# Altium PCB NFCard.PcbDoc
Units mil, origin at the board's own origin, x right, y up, seen from the top; angles counter-clockwise.
Board outline 2125.98 x 3366.14 mil, 2 copper layers (Top Layer, Bottom Layer), stack 34.296 mil thick; 35 components, 38 nets, 141 pads, 80 vias.
Unrouted connection lines stored in the file: 3.
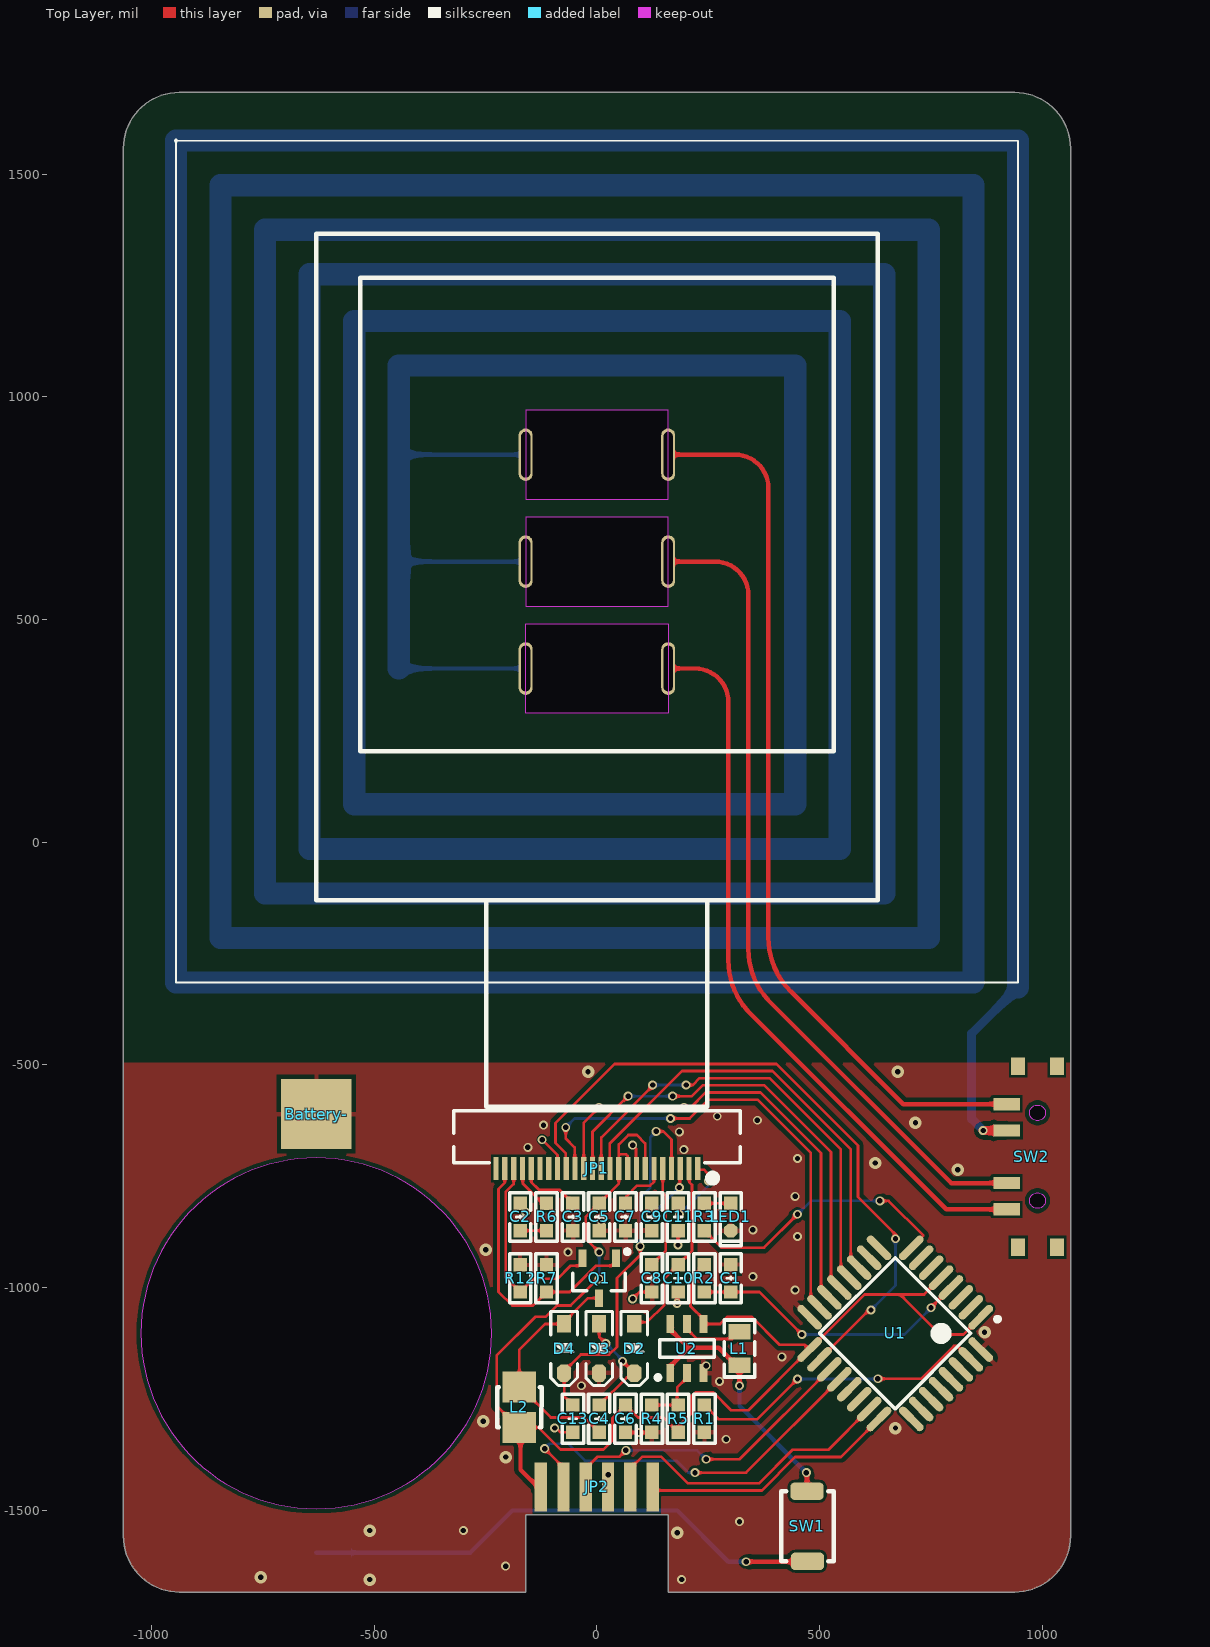
[diagram p0: Top Layer view]
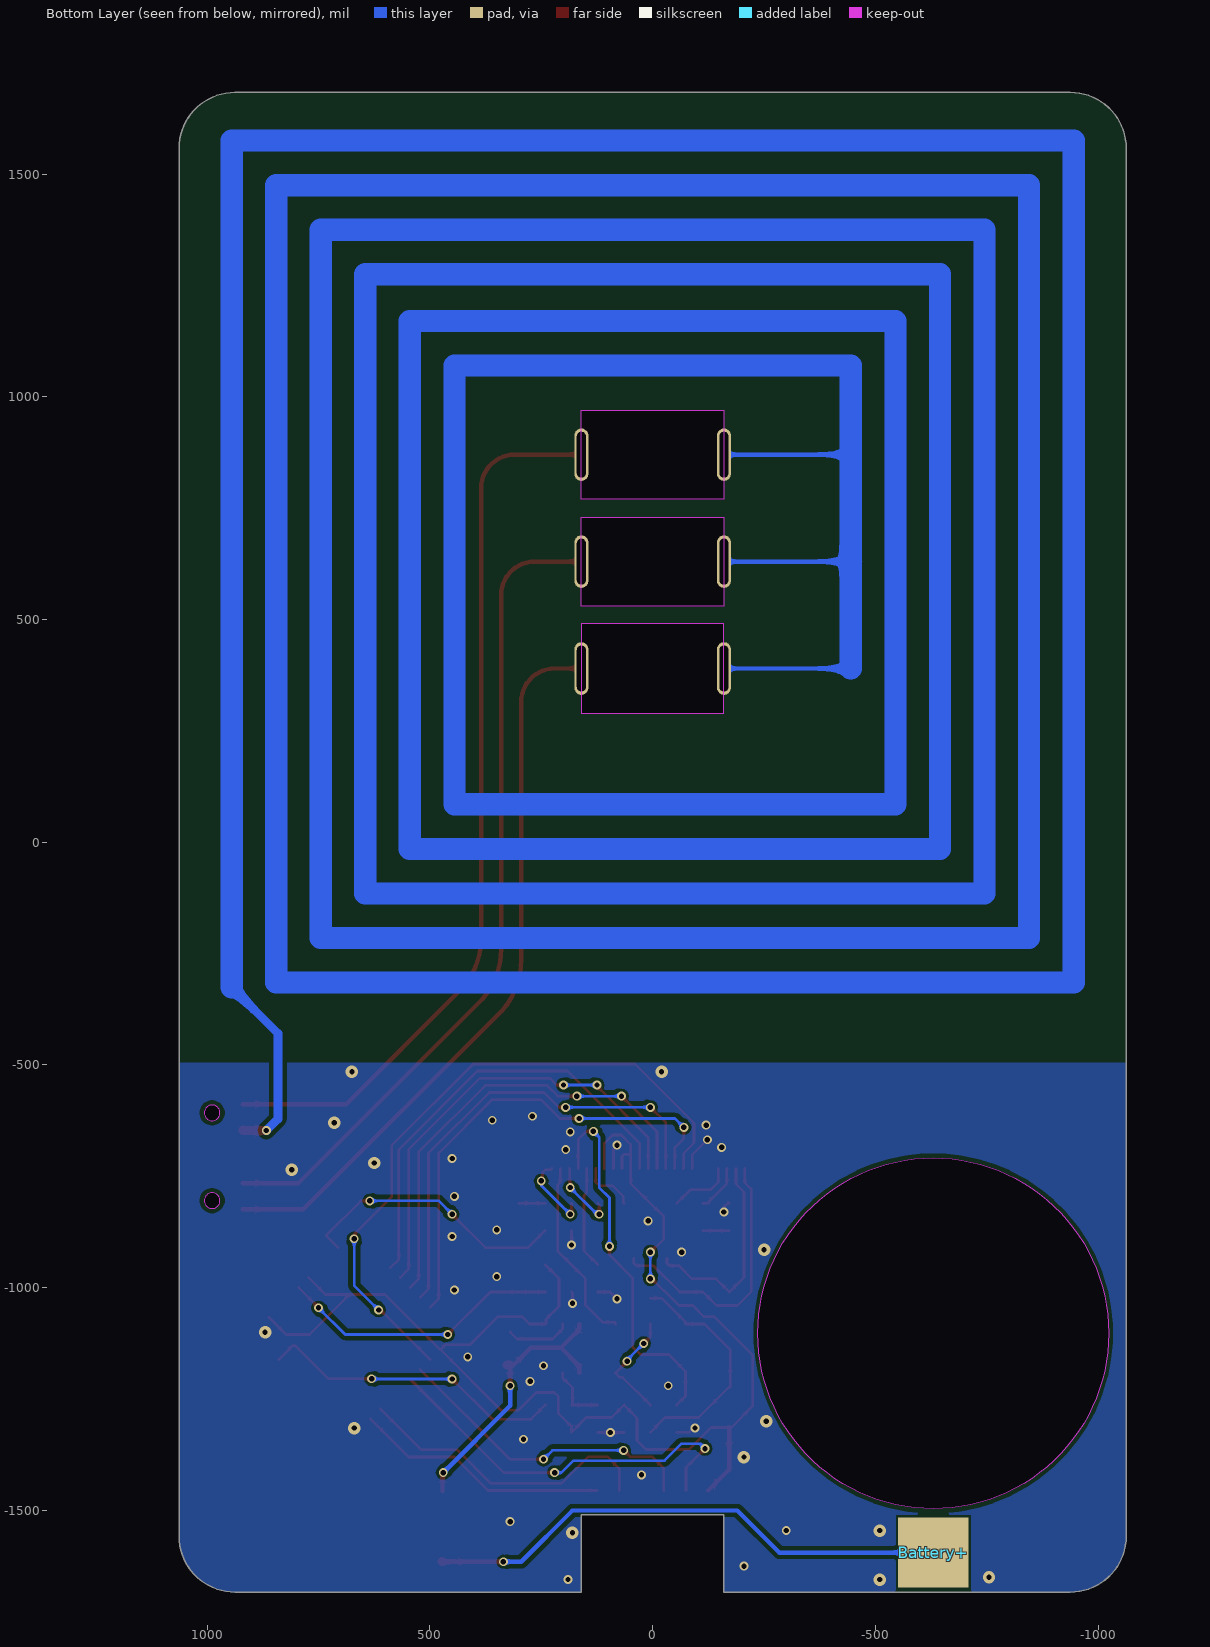
[diagram p1: Bottom Layer view, seen from below]
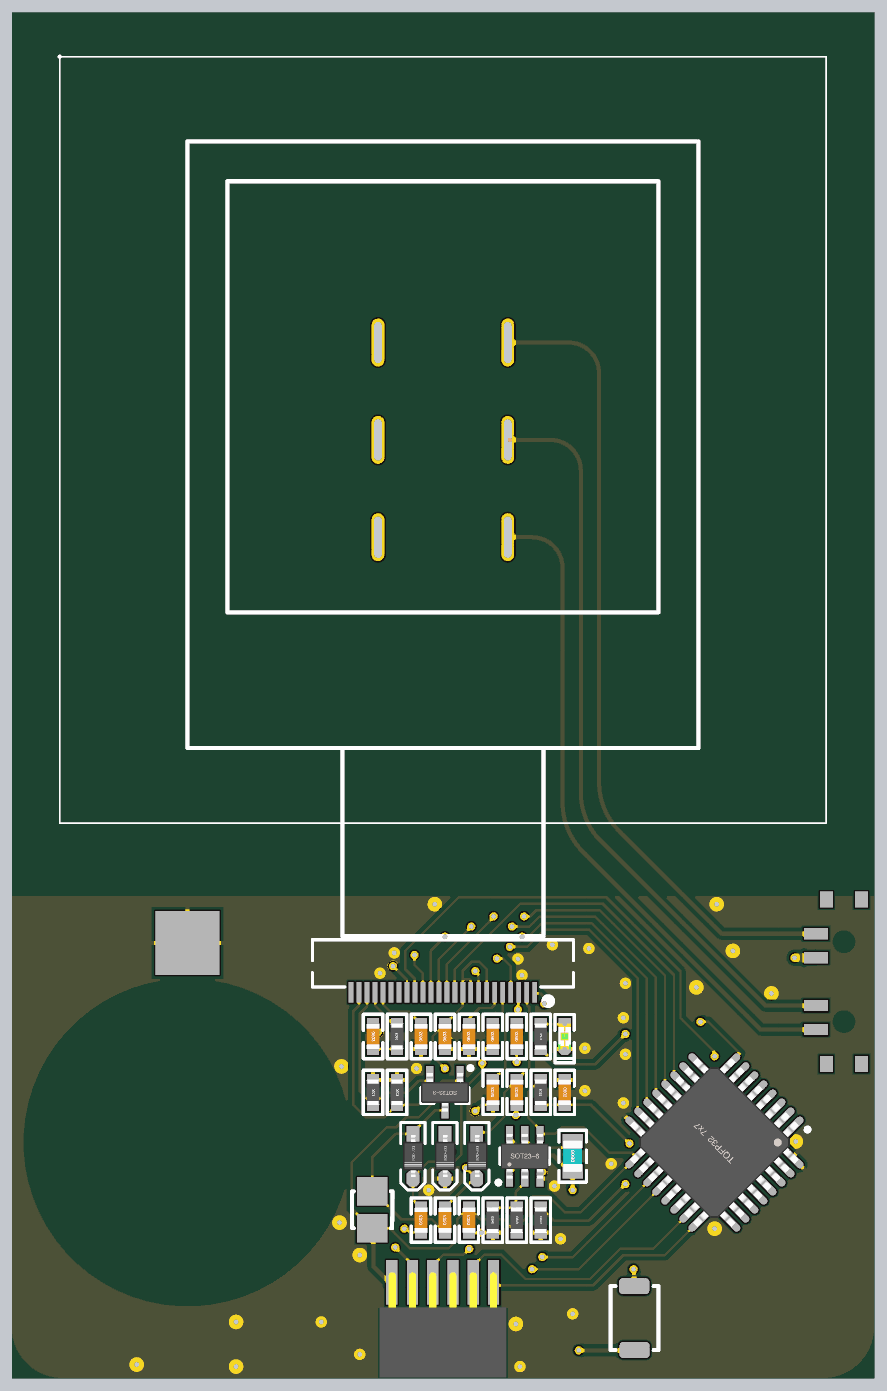
[diagram p2: 3D render of the assembled board from above, using the file's embedded part models]

## Layer stack, top to bottom
Top Solder: solder mask 0.4, Solder Resist, Dk 3.5
Top Layer: signal copper 1.4
Dielectric 1: dielectric 31.4961, FR-4, Dk 4.8
Bottom Layer: signal copper 1.4
Bottom Solder: solder mask 0.4, Solder Resist, Dk 3.5

## Board outline
-1062.99,-1557.87 ccw(c-937.8,-1557.87) -937.8,-1683.07 -160,-1683.07 -160,-1510 160,-1510 160,-1683.07 937.8,-1683.07 ccw(c937.8,-1557.87) 1062.99,-1557.87 1062.99,1557.87 ccw(c937.8,1557.87) 937.8,1683.07 -937.8,1683.07 ccw(c-937.8,1557.87) -1062.99,1557.87
cut-out: -1023.62,-1102.36 ccw(c-629.92,-1102.36) -629.92,-1496.06 ccw(c-629.92,-1102.36) -236.22,-1102.36 ccw(c-629.92,-1102.36) -629.92,-708.66 ccw(c-629.92,-1102.36)
cut-out: -160,770 160,770 160,970 -160,970
cut-out: -160,529.92 160,529.92 160,729.92 -160,729.92
cut-out: -160,290 -160,490 160,490 160,290

## Design rules (kind name [scope] priority, off if disabled: settings)
Clearance [All] p1: gap=10 ignorepadtopadclearanceinfootprint=FALSE except(0: Arc-Hole Track-Hole SMDPad-Hole THPad-Hole Via-Hole Fill-Hole Poly-Hole Region-Hole Text-Hole; 6: Arc-THPad Track-THPad SMDPad-SMDPad SMDPad-THPad SMDPad-Via SMDPad-Fill SMDPad-Poly SMDPad-Region SMDPad-Text THPad-THPad THPad-Via THPad-Fill THPad-Poly THPad-Region THPad-Text Via-Via Via-Fill Via-Poly Via-Region Via-Text)
PlaneConnect [All] p1: pad.planeconnectstyle=Relief pad.reliefexpansion=20 pad.reliefentries=4 pad.reliefconductorwidth=10 pad.reliefairgap=10 via.planeconnectstyle=Direct via.reliefexpansion=20 via.reliefentries=4 via.reliefconductorwidth=10 via.reliefairgap=10
PolygonConnect [All] p1: thpad.connectstyle=Relief thpad.reliefconductorwidth=10 thpad.reliefentries=4 thpad.polygonreliefangle="90 Angle" thpad.airgapwidth=10 smdpad.connectstyle=Relief smdpad.reliefconductorwidth=10 smdpad.reliefentries=4 smdpad.polygonreliefangle="90 Angle" smdpad.airgapwidth=10 via.connectstyle=Direct via.reliefconductorwidth=10 via.reliefentries=4 via.polygonreliefangle="90 Angle" via.airgapwidth=10
RoutingVias [All] p1: holewidth=12 width=20 viastyle="Through Hole" minholewidth=12 minwidth=20 maxholewidth=28 maxwidth=50
SolderMaskExpansion [All] p1: expansion=4
Width [All] p1: maxlimit=100 minlimit=6 preferedwidth=10
29 further rules are at their usual default settings.

## Components (designator, comment, footprint, x,y, rotation, side; value= is the part's Value field where it differs from the comment)
Battery+ "BAT_PAD" BAT_PAD#1 -629.92,-1594.49 r90 top
Battery- "BAT_PAD" BAT_PAD#2 -640,-615 r90 top
C1 "0.1uF" "C 0603_L" 300.28,-978.94 r270 top
C2 "1uF" "C 0603_L" -172.17,-841.14 r270 top
C3 "1uF" "C 0603_L" -54.06,-841.14 r90 top
C4 "0.1uF" "C 0603_L" 5,-1293.9 r90 top
C5 "0.1uF" "C 0603_L" 5,-841.14 r90 top
C6 "4.7uF" "C 0603_L" 64.06,-1293.9 r90 top
C7 "1uF" "C 0603_L" 64.06,-841.14 r90 top
C8 "1uF" "C 0603_L" 123.11,-978.94 r90 top
C9 "1uF" "C 0603_L" 123.11,-841.14 r90 top
C10 "1uF" "C 0603_L" 182.17,-978.94 r90 top
C11 "1uF" "C 0603_L" 182.17,-841.14 r90 top
C13 "1uF" "C 0603_L" -54.06,-1293.9 r90 top
D2 "1N5819" SOD-323 83.74,-1136.42 r270 top
D3 "1N5819" SOD-323 5,-1136.42 r270 top
D4 "1N5819" SOD-323 -73.74,-1136.42 r270 top
JP1 "FPC1.0-24P" "FPC0.5 CB-24P" 0,-633.98 r180 top
JP2 "HDR-1X6" HDR1.27-M-6P-S 0,-1455 r0 top
L1 "4.7uH" "L 0805_L" 319.96,-1136.42 r90 top
L2 "68uH" "FB 2520_L" -174.13,-1268.31 r90 top
LED1 "Blue" "LED 0603B" 300.28,-841.14 r270 top
Q1 "Si1308EDL" SOT23-3L 5,-978.94 r180 top
R1 "10K" "R 0603_L" 241.22,-1293.9 r270 top
R2 "10K" "R 0603_L" 241.22,-978.94 r90 top
R3 "3K" "R 0603_L" 241.22,-841.14 r270 top
R4 "NC" "R 0603_L" 123.11,-1293.9 r90 top
R5 "0R" "R 0603_L" 182.17,-1293.9 r270 top
R6 "1K" "R 0603_L" -113.11,-841.14 r90 top
R7 "10K" "R 0603_L" -113.11,-978.94 r270 top
R12 "3R" "R 0603_L" -172.17,-978.94 r270 top
SW1 "3x6x5" "TSW SMD-3*4*2" 472.44,-1535.43 r270 top
SW2 "MSKT-13C01" MSKT-13C01 988.9,-705.94 r180 top
U1 "STM32L051K8" "TQFP32 7x7_N" 669.29,-1102.36 r135 top
U2 "TPS61221DCKT" SOT23-6L 201.85,-1136.42 r0 top

## Footprints (in the part's own frame and the unit in brackets; to place one, negate y for a bottom-side part, rotate by r counter-clockwise, add the part's x,y. Pads: shape width x height; smd on the part's side, far side on the other; paste and mask are expansions set on the pad)
BAT_PAD#1 [mm]
  rect 4x4 smd far side: ""(0,0)
BAT_PAD#2 [mm]
  rect 4x4 smd: ""(0.121,-0.256)
"C 0603_L" [mil] "无极性贴片电容"
  rect 30x30 smd: 1(-30.59,0) 2(30.59,0)
  silkscreen extent -55,-24 55,24, body extent -31,-16 31,16, height 32
"FB 2520_L" [mil] "小功率贴片磁珠"
  rect 70x75 smd: 1(-45.28,0) 2(45.28,0)
  silkscreen extent -45,-50 45,50, body extent -50,-41 50,41, height 39
"FPC0.5 CB-24P" [mm] "长：16.2mm，宽：5.2mm，高：2mm"
  rect 0.3x1.3 smd: 1(-5.75,2.497) 2(-5.25,2.497) 3(-4.75,2.497) 4(-4.25,2.497) 5(-3.75,2.497) 6(-3.25,2.497) 7(-2.75,2.497) 8(-2.25,2.497) 9(-1.75,2.497) 10(-1.25,2.497) 11(-0.75,2.497) 12(-0.25,2.497) 13(0.25,2.497) 14(0.75,2.497) 15(1.25,2.497) 16(1.75,2.497) 17(2.25,2.497) 18(2.75,2.497) 19(3.25,2.497) 20(3.75,2.497) 21(4.25,2.497) 22(4.75,2.497) 23(5.25,2.497) 24(5.75,2.497)
  silkscreen extent -8.18,-0.8 8.18,3.23
HDR1.27-M-6P-S [mm] "直插，脚距：1.27mm"
  rect 0.7x2.8 smd: 1(-3.2,0.2) 2(-1.905,0.2) 3(-0.635,0.2) 4(0.635,0.2) 5(1.905,0.2) 6(3.175,0.2)
  body extent -3.97,-5.77 3.97,0.83, height 1.1
"L 0805_L" [mil] "小功率贴片电感"
  rect 35x50 smd: 1(-37.4,0) 2(37.4,0)
  silkscreen extent -64,-34 64,34, body extent -39,-24 39,24, height 35
"LED 0603B" [mil] "蓝色0603LED"
  rect 30x30 smd: 1(-30.59,0)
  oct 30x30 smd: 2(30.59,0)
  silkscreen extent -54,-24 65,24, body extent -31,-16 32,16, height 24
MSKT-13C01 [mm]
  rect 1.5x0.7 smd: 1(1.75,3) 2(1.75,1.5) 3(1.75,-1.5) 4(1.75,-3)
  rect 0.8x1 smd: ""(-1.1,5.15) ""(-1.1,-5.15) ""(1.1,5.15) ""(1.1,-5.15)
  Keep-Out Layer board cut-out: -0.45,-2.5 -0.416,-2.328 -0.318,-2.182 -0.172,-2.084 0,-2.05 0,-2.05 0.172,-2.084 0.318,-2.182 0.416,-2.328 0.45,-2.5 0.45,-2.5 0.416,-2.672 0.318,-2.818 0.172,-2.916 0,-2.95 0,-2.95 -0.172,-2.916 -0.318,-2.818 -0.416,-2.672 -0.45,-2.5
  Keep-Out Layer board cut-out: 0,2.05 -0.172,2.084 -0.318,2.182 -0.416,2.328 -0.45,2.5 -0.45,2.5 -0.416,2.672 -0.318,2.818 -0.172,2.916 0,2.95 0,2.95 0.172,2.916 0.318,2.818 0.416,2.672 0.45,2.5 0.45,2.5 0.416,2.328 0.318,2.182 0.172,2.084 0,2.05
"R 0603_L" [mil] "1/10W贴片电阻"
  rect 30x30 smd: 1(-30.59,0) 2(30.59,0)
  silkscreen extent -55,-24 55,24, body extent -31,-16 32,16, height 16
SOD-323 [mm] "1.8x1.3X0.9mm（长宽高，不包括引脚）"
  rect 1x0.8 smd: 1(-1.4,0)
  oct 1x0.8 smd: 2(1.4,0)
  silkscreen extent -2.11,-0.76 2.11,0.76, body extent -1.34,-0.63 1.31,0.67, height 1
SOT23-3L [mm] "3x1.3x1mm(长宽高)"
  rect 0.45x1 smd: 1(-0.95,-1.143) 2(0.95,-1.143) 3(0,1.125)
  silkscreen extent -1.73,-1.65 1.5,0.7, body extent -1.5,-1.2 1.5,1.2, height 1.05
SOT23-6L [mm] "3x1.6x1.1mm(长宽高)"
  rect 0.45x1 smd: 1(-0.95,-1.397) 2(0,-1.397) 3(0.95,-1.397) 4(0.95,1.397) 5(0,1.397) 6(-0.95,1.397)
  silkscreen extent -1.77,-1.78 1.55,0.51, body extent -1.5,-1.4 1.5,1.4, height 1.15
"TQFP32 7x7_N" [mm] "32脚，体宽：7x7mm, 脚距：0.8mm"
  oval 0.45x1.8 smd: 1(-2.803,-4.1) 2(-2.003,-4.1) 3(-1.203,-4.1) 4(-0.403,-4.1) 5(0.397,-4.1) 6(1.197,-4.1) 7(1.997,-4.1) 8(2.797,-4.1) 17(2.797,4.1) 18(1.997,4.1) 19(1.197,4.1) 20(0.397,4.1) 21(-0.403,4.1) 22(-1.203,4.1) 23(-2.003,4.1) 24(-2.803,4.1)
  oval 1.8x0.45 smd: 9(4.097,-2.8) 10(4.097,-2) 11(4.097,-1.2) 12(4.097,-0.4) 13(4.097,0.4) 14(4.097,1.2) 15(4.097,2) 16(4.097,2.8) 25(-4.103,2.8) 26(-4.103,2) 27(-4.103,1.2) 28(-4.103,0.4) 29(-4.103,-0.4) 30(-4.103,-1.2) 31(-4.103,-2) 32(-4.103,-2.8)
  silkscreen extent -3.68,-4.82 3.05,3.05, body extent -4.5,-4.5 4.5,4.5, height 1.05
"TSW SMD-3*4*2" [mm] "3*6*2.5mm"
  rrect50% 1x1.9 smd: 1(-2,-0.02) 2(2,0)
  silkscreen extent -2,-1.5 2,1.5, body extent -2,-1.5 2,1.45, height 2

## Part data
C1 C2 C3 C4 C5 C6 C7 C8 C9 C10 C11 C13: library part C, "无极性贴片电容"
D2 D3 D4: "肖特基二极管"
JP1: library part FPC-24P, "FPC连接器", BOM名称=FPC, 学习资源=www.oooc
JP2: library part "Header 6", "6P接插件"
L1 L2: library part L, "小功率贴片电感"
LED1: library part LED-SMD, "贴片LED", BOM名称=Ì, 学习资源=www.oooc
Q1: library part AO3400, "N沟道 30V/4.2A", BOM名称=³, 学习资源=www.oooc, 描述="N沟道 30"
R1 R2 R3 R4 R5 R6 R7 R12: library part R, "贴片电阻"
SW1: library part "TSW 3x6", "3x6轻触开关", BOM名称=3x6Ç, 学习资源=www.oooc
SW2: "七脚拨动开关"

## Free pads (board coordinates)
  oval 31.5x118.11 hole 102.36 slot 19.68 at 0 deg: 2(-160,390) 2(-160,629.92) 2(-160,870) 3(160,390) 3(160,629.92) 3(160,870)

## Via types
v1: diameter 20, hole 12, Top Layer to Bottom Layer, 66 vias
v2: diameter 28, hole 12, Top Layer to Bottom Layer, 14 vias

## Nets (pads, with @x,y where several pads share a name; then routed paths per layer and width w, separated by ;. In a path a pad name is that pad's centre, name@x,y a point inside that pad or via, vN(x,y) a via of type N, cw(c..) or ccw(c..) an arc to the next point about the centre after c; other vN are vias at no path point)
3V3: C5.2 C6.2 JP1.7 JP1.9 JP1.10 JP2.1 L2.1 R2.2 R5.2 U1.1 U1.5 U1.17 U2.4 | length 3111
  Top Layer w6: v1(5,-980) 1.3,-980 -25.93,-1007.23 -26.23,-1007.23 -59.01,-1040 -90,-1040 -115.3,-1065.3 -138.52,-1065.3 -224.63,-1151.41 -224.63,-1265.58 -176.63,-1313.58 L2.1 -171.63,-1313.58 -131.42,-1313.58 -81.99,-1363.01 14.87,-1363.01 35,-1342.87 35,-1292.36 C6.2 92.06,-1291.31 148.98,-1291.31 R5.2 182.17,-1311.69 211.69,-1282.16 211.69,-1244.45 221.14,-1235 261.3,-1235 301.3,-1275 340,-1275 476.38,-1138.62 U1.17 600.9,-1015 680,-1015 ; v1(5,-920) 4.88,-920 -25,-890.12 -25,-840.55 C5.2 49.21,-766.34 JP1.10 49.21,-703.51 ; JP1.9 68.9,-704.22 64.68,-700 52.73,-700 49.21,-703.51 ; JP1.7 108.27,-675.74 89.53,-657 70.47,-657 49.21,-678.26 49.21,-703.51 ; R2.2 210.17,-979.4 210.17,-1041.5 239.25,-1070.59 U2.4 276.68,-1081.42 293.1,-1065 346.83,-1065 409.83,-1128 465.75,-1128 U1.17@476.37,-1138.62 ; U1.5 734.53,-1015 680,-1015 ; U1.1 822.7,-1105 770,-1105 680,-1015
  Top Layer w10: L2.1@-171.63,-1313.58 -171.63,-1408.37 JP2.1@-125,-1455
  Bottom Layer w6: v1(5,-980) v1(5,-920)
ANT: pad.2 pad.3 SW2.1 SW2.2 SW2.3 SW2.4 | length 38948.3
  Top Layer w10: pad.3@175,390 220,390 cw(c220,315) 295,315 295,-265 ccw(c465,-265) 337.93,-377.93 784.06,-824.06 SW2.1 ; pad.3@175,629.92 265,629.92 ; pad.3@175,870 310,870 cw(c310,795) 385,795 385,-214.48 ccw(c555,-214.48) 434.79,-334.68 ; 265,630 cw(c265,555) 340,555 340,-240 ccw(c510,-240) 382.93,-352.93 795,-765 SW2.2 ; 434.74,-334.74 687.83,-587.83 SW2.4
  Top Layer w20: v1(867,-647) 918.11,-647 919.11,-646 SW2.3
  Bottom Layer w10: -445,390 pad.2@-175,390 ; -445,630 -175.08,630 pad.2@-175,629.92 ; -445,870 pad.2@-175,870 ; pad.3@165,629.92 pad.3@165.08,630
  Bottom Layer w20: v1(867,-647) 841,-621 841,-429.33 945,-325.33 ccw(c805,-325) 945,-325
  Bottom Layer w50: -445,390 -445,630 -445,870 -445,1070 445,1070 445,85 -545,85 -545,1170 545,1170 545,-15 -645,-15 -645,1275 645,1275 645,-115 -745,-115 -745,1375 745,1375 745,-215 -845,-215 -845,1475 845,1475 845,-315 -945,-315 -945,1575 945,1575 945,-325.33
GDR: JP1.23 Q1.1 R7.2 | length 609.2
  Top Layer w6: JP1.23 -206.69,-764.07 -221,-778.37 -221,-1009.08 -190.08,-1040 -143.58,-1040 R7.2 -61.06,-1009.53 -2.16,-950.62 36.54,-950.62 42.4,-944.76 Q1.1
GND: Battery-. C1.1 C2.1 C3.1 C5.1 C6.1 C7.1 C8.1 C9.1 C10.1 C11.1 C13.1 D3.2 JP1.8 JP1.17 JP2.4 LED1.2 R1.2 R4.1 R7.1 R12.1 U1.16 U1.32 U2.3 | length 376
  Top Layer w6: C2.1 -170,-808.39 -160.17,-818.22 -160.17,-829.83 v1(-160,-830) ; v1(-122.92,-667.75) -88.58,-702.09 JP1.17 ; v1(-95,-1315) -91.21,-1315 -81.72,-1324.49 C13.1 ; C6.1 64.57,-1325 v1(95,-1325) 122.6,-1325 R4.1 ; v1(80,-1025) 95.47,-1009.53 C8.1 ; v1(80,-680) 87.8,-687.8 87.8,-731.5 JP1.8 ; v1(180,-1035) 180,-1011.69 C10.1 ; v1(182,-904) 182,-871.9 C11.1
  other v1: 190,-1655 -205,-1625 -300,-1545 320,-1525 25,-1420 290,-1340 -35,-1220 275,-1210 245,-1175 415,-1155 445,-1005 350,-975 -65,-920 450,-885 350,-870 10,-850 445,-795 450,-710 195,-690 -155,-685 185,-650 -120,-635 360,-624 270,-615
  other v2: -510,-1655 -755,-1650 180,-1550 -510,-1545 -205,-1380 670,-1315 -255,-1300 870,-1100 -250,-915 810,-735 625,-720 715,-630 -20,-515 675,-515
I2C1_SCL: U1.29
I2C1_SDA: U1.30
INK_BUSY: JP1.16 U1.18 | length 1509.7
  Top Layer w6: JP1.16 -69.68,-731.5 -69.68,-698.37 -93,-675.04 -93,-630.47 39.8,-497.67 402.67,-497.67 585.84,-680.84 585.84,-795.84 670,-880 v1(670,-890) ; U1.18 610.44,-1050 v1(615,-1050)
  Bottom Layer w6: v1(615,-1050) 670,-995 v1(670,-890)
INK_CLK: JP1.12 U1.12 | length 1025.1
  Top Layer w6: JP1.12 9.84,-662.68 125,-547.53 v1(125,-545) ; v1(200.15,-545) 215.31,-545 230.64,-529.67 387.04,-529.67 547.57,-690.2 547.57,-958.37 U1.12
  Bottom Layer w6: v1(125,-545) v1(200.15,-545)
INK_CS: JP1.13 U1.13 | length 1034.6
  Top Layer w6: JP1.13 -9.84,-649.84 v1(70,-570) ; v1(170,-570) 212.94,-570 237.27,-545.67 375.67,-545.67 525.3,-695.3 525.3,-980.64 U1.13
  Bottom Layer w6: v1(70,-570) v1(170,-570)
INK_DC: JP1.14 U1.14 | length 1051.4
  Top Layer w6: JP1.14 -29.53,-629.53 v1(5,-595) ; v1(195.28,-595) 210.56,-595 243.89,-561.67 366.67,-561.67 503.03,-698.03 503.03,-1002.91 U1.14
  Bottom Layer w6: v1(5,-595) v1(195.28,-595)
INK_MOSI: JP1.11 U1.11 | length 1010.7
  Top Layer w6: JP1.11 28.75,-731.5 28.75,-676.1 191.18,-513.67 393.67,-513.67 569.84,-689.84 569.84,-936.1 U1.11
INK_RST: JP1.15 U1.15 | length 1080.8
  Top Layer w6: v1(-70,-640) -70,-665 -49.99,-685.01 -49.99,-731.5 JP1.15 ; v1(165,-620) 208.19,-620 250.52,-577.67 360.04,-577.67 480,-697.63 480,-1024.43 U1.15
  Bottom Layer w6: v1(-70,-640) -50,-620 v1(165,-620)
NetBattery+_1: Battery+. SW1.2 | length 1189.5
  Top Layer w10: v1(335,-1615) SW1.2@471.61,-1615
  Top Layer w20: SW1.2@471.61,-1615 SW1.2
  Bottom Layer w10: Battery+. -284.49,-1594.49 -190,-1500 180,-1500 295,-1615 v1(335,-1615)
NetC2_2: C2.2 R6.1 | length 59.1
  Top Layer w6: C2.2 R6.1
NetC4_2: C4.2 D2.2 D3.1 | length 251.3
  Top Layer w6: C4.2 67.3,-1201.01 74.27,-1201.01 D2.2 v1(57.2,-1165) ; D3.1 5,-1110 v1(20,-1125)
  Bottom Layer w6: v1(20,-1125) 57.2,-1162.2 v1(57.2,-1165)
NetL1_2: L1.2 U2.5 | length 145
  Top Layer w6: U2.5 201.85,-1092.24 224.61,-1115 303.98,-1115 L1.2
NetLED1_1: LED1.1 R3.1 | length 59.1
  Top Layer w6: R3.1 LED1.1
NetR1_1: R1.1 U1.31 | length 692
  Top Layer w6: R1.1 272.91,-1295 360,-1295 v1(450,-1205) ; v1(630.62,-1204.38) 727.21,-1204.38 801.34,-1130.25 808.53,-1130.25 U1.31
  Bottom Layer w6: v1(450,-1205) 630,-1205 v1(630.62,-1204.38)
NetR3_2: R3.2 U1.8 | length 621.7
  Top Layer w6: R3.2 279.49,-910 375,-910 v1(450,-835) ; v1(635,-805) 654.56,-805 732.73,-883.17 U1.8
  Bottom Layer w6: v1(450,-835) 480,-805 v1(635,-805)
NetR4_2: R4.2 R5.1 U2.2 | length 140.9
  Top Layer w6: R4.2 R5.1 180,-1261.14 180,-1224.09 201.85,-1202.24 U2.2
NRST: C1.2 R2.1 U1.4 | length 637.2
  Top Layer w6: R2.1 C1.2 364.53,-1009.53 v1(460,-1105) ; v1(750,-1045) 750,-1044.53 794.64,-999.9 U1.4
  Bottom Layer w6: v1(460,-1105) 690,-1105 v1(750,-1045)
PREVGH: C13.2 D4.2 JP1.4 | length 852.3
  Top Layer w6: C13.2 -73.74,-1243.62 D4.2 -73.74,-1187.6 -36.14,-1150 27.53,-1150 45,-1132.53 45,-978.27 95.11,-928.16 95.11,-927.96 97,-926.07 v1(97,-907) ; v1(133,-649) 149,-649 167.32,-667.32 JP1.4
  Bottom Layer w6: v1(97,-907) 97,-798 120,-775 120,-662 v1(133,-649)
PREVGL: C10.2 D2.1 JP1.2 | length 422.3
  Top Layer w6: D2.1 83.74,-1077.36 112.64,-1077.36 151.11,-1038.89 151.11,-979.4 C10.2 213.22,-917.29 213.22,-769.01 208,-763.79 207.47,-763.26 207.47,-754.95 207.47,-733.06 JP1.2
RESE: JP1.22 Q1.2 R12.2 | length 475.7
  Top Layer w6: JP1.22 -187.01,-767.01 -205,-785 -205,-976.69 R12.2 -142.64,-980 -88.82,-980 -59.44,-950.62 -38.26,-950.62 -32.4,-944.76 Q1.2
SW: C4.1 D4.1 L2.2 Q1.3 | length 534.5
  Top Layer w6: C4.1 -28.18,-1291.31 -103.36,-1291.31 -171.63,-1223.03 L2.2 -174.13,-1139.13 -116.3,-1081.3 D4.1 -73.74,-1077.36 -19.61,-1023.23 Q1.3
SWCLK: JP2.6 U1.24 | length 574.6
  Top Layer w6: JP2.6@125,-1455 370,-1455 445,-1380 547.7,-1380 U1.24
SWDIO: JP2.5 U1.23 | length 690.1
  Top Layer w6: JP2.5@75,-1455 75,-1405.79 101.78,-1379.01 144.16,-1379.01 204.16,-1439 363.37,-1439 438.37,-1364 519.15,-1364 U1.23
TSCL: JP1.19
TSDA: JP1.18
USART1_RX: JP2.2 U1.20 | length 891.4
  Top Layer w6: v1(-117.5,-1361.06) -75,-1403.56 JP2.2@-75,-1455 ; v1(220,-1415) 334.53,-1415 U1.20
  Bottom Layer w6: v1(-117.5,-1361.06) -106.44,-1350 -65,-1350 -27,-1388 178,-1388 205,-1415 v1(220,-1415)
USART1_TX: JP2.3 U1.19 | length 704.8
  Top Layer w6: JP2.3@-25,-1455 -25,-1405.79 1.78,-1379.01 50.99,-1379.01 v1(65,-1365) ; v1(245,-1385) 319.99,-1385 U1.19
  Bottom Layer w6: v1(65,-1365) 225,-1365 v1(245,-1385)
VBAT: L1.1 SW1.1 U2.1 U2.6 | length 624.9
  Top Layer w10: U2.1 164.45,-1176.23 205.68,-1135 164.45,-1093.77 U2.6 ; 208.51,-1135 273.64,-1135 312.46,-1173.82 L1.1 320,-1173.86 v1(320,-1220) ; v1(470,-1415) 471.66,-1416.66 SW1.1
  Top Layer w20: L1.1 L1.1@327.46,-1173.82
  Bottom Layer w10: v1(320,-1220) 320,-1265 v1(470,-1415)
VCOM: C11.2 JP1.1 | length 163.9
  Top Layer w6: C11.2 182.17,-832.17 v1(185,-835) ; JP1.1 229.09,-735 240,-735 247.32,-742.32 247.32,-757.32 v1(250,-760)
  Bottom Layer w6: v1(185,-835) 250,-770 v1@250,-767.5
VGH: C3.2 JP1.20 | length 143.7
  Top Layer w6: JP1.20 -147.64,-762.48 -130.12,-780 -84.61,-780 C3.2
VGL: JP1.21 R6.2 | length 106
  Top Layer w6: JP1.21 -166.54,-733.06 -166.54,-766.2 -122.19,-810.55 R6.2
VPP: C7.2 JP1.6 | length 122
  Top Layer w6: C7.2 65.87,-808.73 65.87,-795 90,-770.87 119.56,-770.87 127.95,-762.48 JP1.6
VSH: C8.2 JP1.5 | length 231.6
  Top Layer w6: C8.2 154.17,-917.29 154.17,-793.2 147.64,-786.67 JP1.5
VSL: C9.2 JP1.3 | length 161.2
  Top Layer w6: v1(120,-835) 120,-813.66 C9.2 ; v1(185,-775) 182.49,-772.49 182.49,-767.51 186.23,-763.77 186.23,-733.06 JP1.3
  Bottom Layer w6: v1(120,-835) 125,-835 v1(185,-775)
pads on no net: JP1.24 SW2. U1.2 U1.3 U1.6 U1.7 U1.9 U1.10 U1.21 U1.22 U1.25 U1.26 U1.27 U1.28

## Polygon pours and split planes (outlines as drawn)
GND on Bottom Layer "GND_L02_P008" (solid, remove dead copper, pour order 8): -1062.99,-1557.87 ccw(c-937.8,-1557.87) -937.8,-1683.07 -160,-1683.07 -160,-1510 160,-1510 160,-1683.07 937.8,-1683.07 ccw(c937.8,-1557.87) 1062.99,-1557.87 1062.99,1557.87 ccw(c937.8,1557.87) 937.8,1683.07 -937.8,1683.07 ccw(c-937.8,1557.87) -1062.99,1557.87
GND on Top Layer "GND_L01_P007" (solid, remove dead copper, pour order 7): -1062.99,-1557.87 ccw(c-937.8,-1557.87) -937.8,-1683.07 -160,-1683.07 -160,-1510 160,-1510 160,-1683.07 937.8,-1683.07 ccw(c937.8,-1557.87) 1062.99,-1557.87 1062.99,1557.87 ccw(c937.8,1557.87) 937.8,1683.07 -937.8,1683.07 ccw(c-937.8,1557.87) -1062.99,1557.87

## Other copper
Top Layer:
  pour cut-out: -1165,1765 -1140,1740 1290,1740 1290,-250 1120,-495 -1135,-495
Bottom Layer:
  pour cut-out: -1165,1765 -1140,1740 1290,1740 1290,-250 1120,-495 -1135,-495

## Silkscreen, mask and mechanical layers (free items; w line width, h text height)
Top Overlay:
  lines w1: -944.88,-314.96 -944.88,-314.96
  lines w3.94: 944.88,-314.96 944.88,1574.8 ; 944.88,-314.96 -944.88,-314.96 -944.88,1574.8 944.88,1574.8 ; 944.88,-314.96 944.88,1574.8
  lines w10: -248.03,-133.31 -248.03,-593.94 248.03,-593.94 248.03,-133.31 ; 531.5,204.65 -531.5,204.65 -531.5,1267.64 531.5,1267.64 531.5,205 ; -944.88,1574.8 -944.88,1574.8 ; -629.92,-130 629.92,-130 629.92,1366.06 -629.92,1366.06 -629.92,-130
Mechanical 1:
  circle w10: c-629.92,-1102.36 r393.7
  lines w10: -160,770 -160,970 ; -160,770 -160,770 ; -160,770 160,770 ; -160,970 160,970 160,770 ; -160,970 -160,970 ; 160,770 160,770 ; -1062.99,-1557.87 ccw(c-937.8,-1557.87) -937.8,-1683.07 -160,-1683.07 -160,-1510 160,-1510 160,-1683.07 937.8,-1683.07 ccw(c937.8,-1557.87) 1062.99,-1557.87 1062.99,1557.87 ccw(c937.8,1557.87) 937.8,1683.07 -937.8,1683.07 ccw(c-937.8,1557.87) -1062.99,1557.87 -1062.99,-1557.87 ; -160,290 160,290 160,490 -160,490 -160,290 ; -160,529.92 160,529.92 160,729.92 -160,729.92 -160,529.92